# EAGLE board CFT-PB2 (EAGLE 5.11)
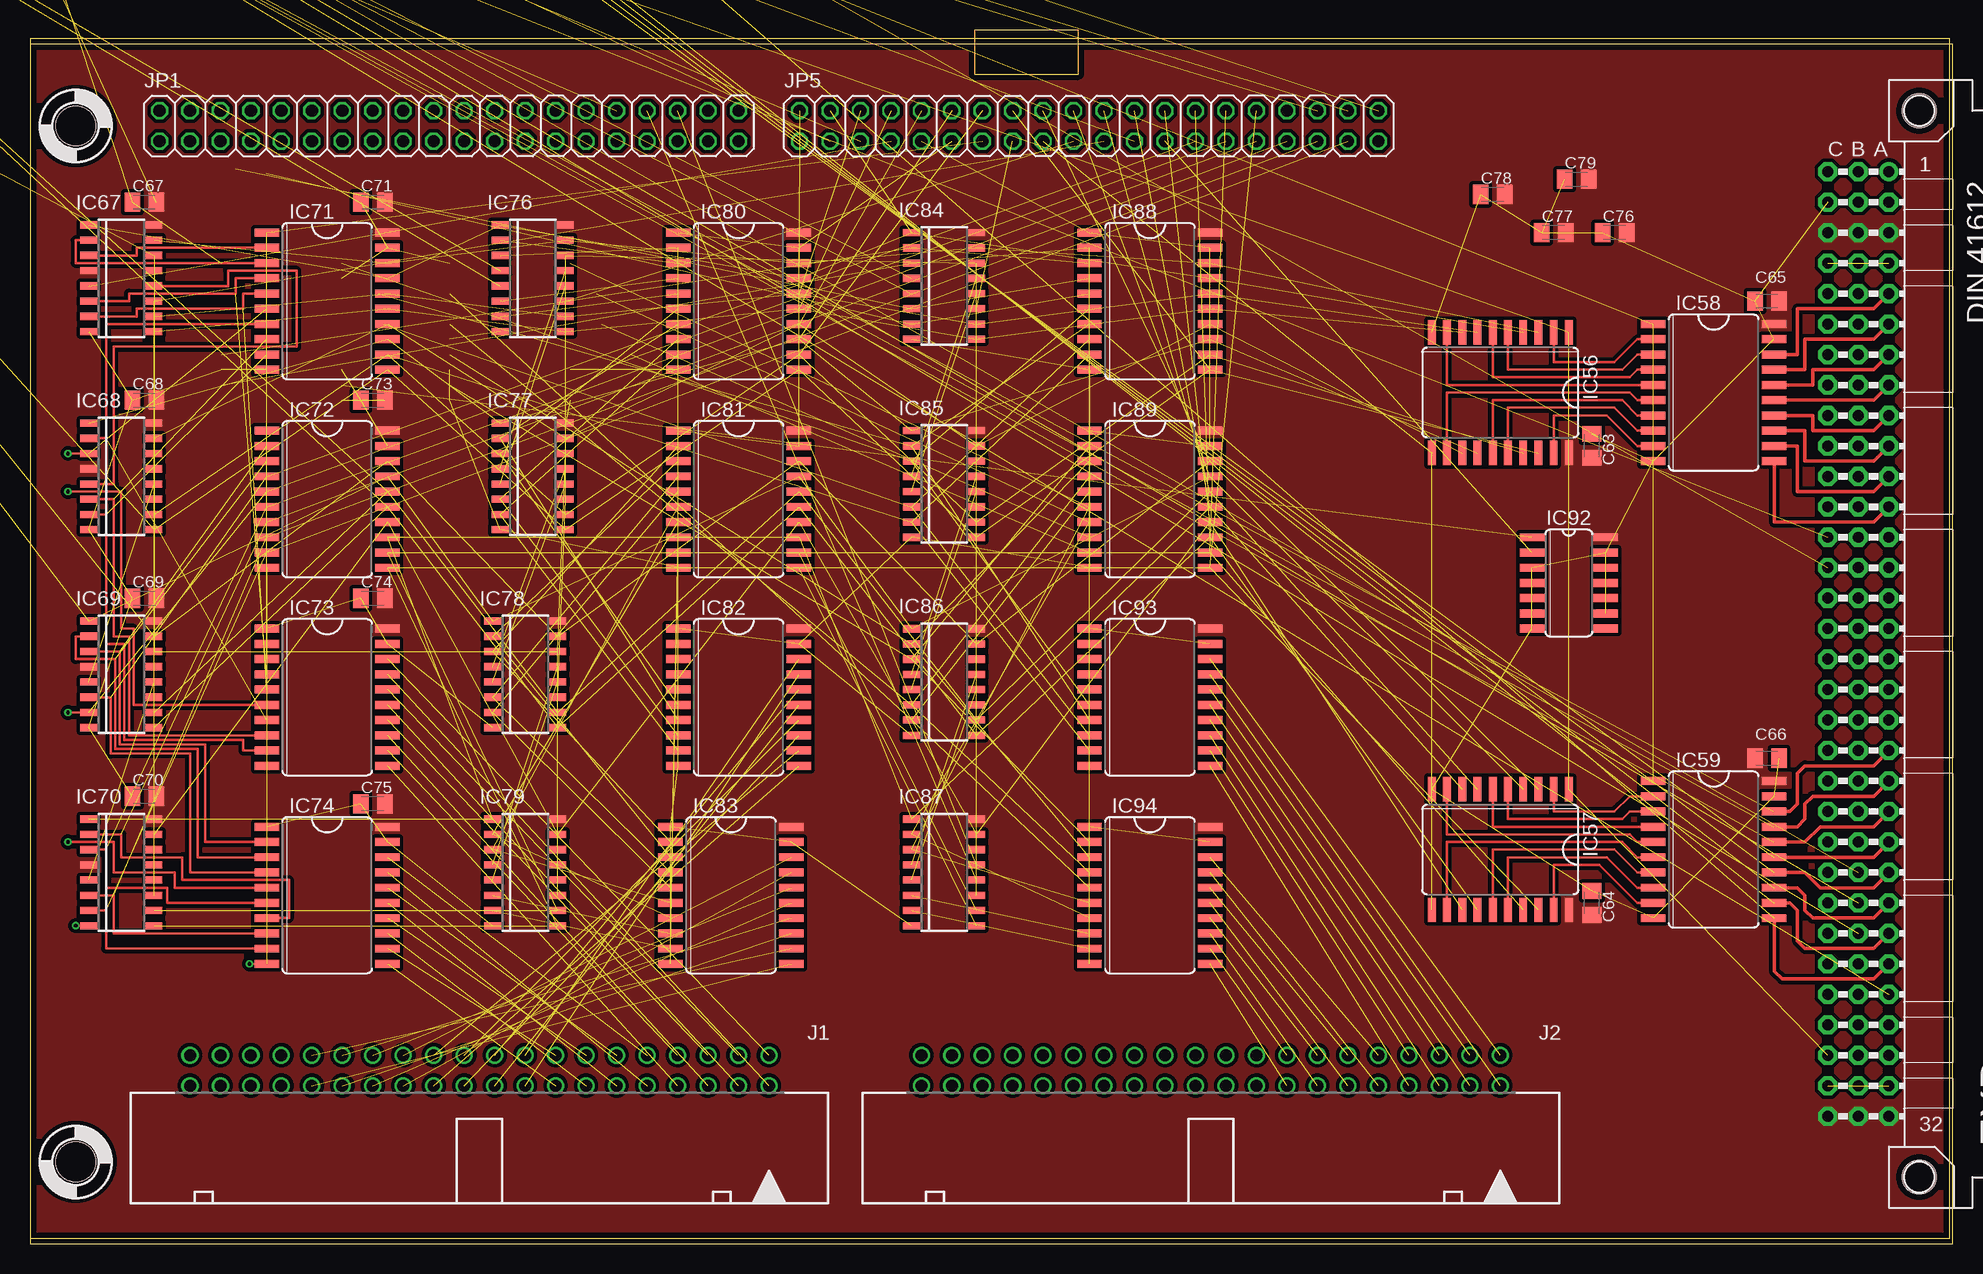
[diagram p0: board, top side]
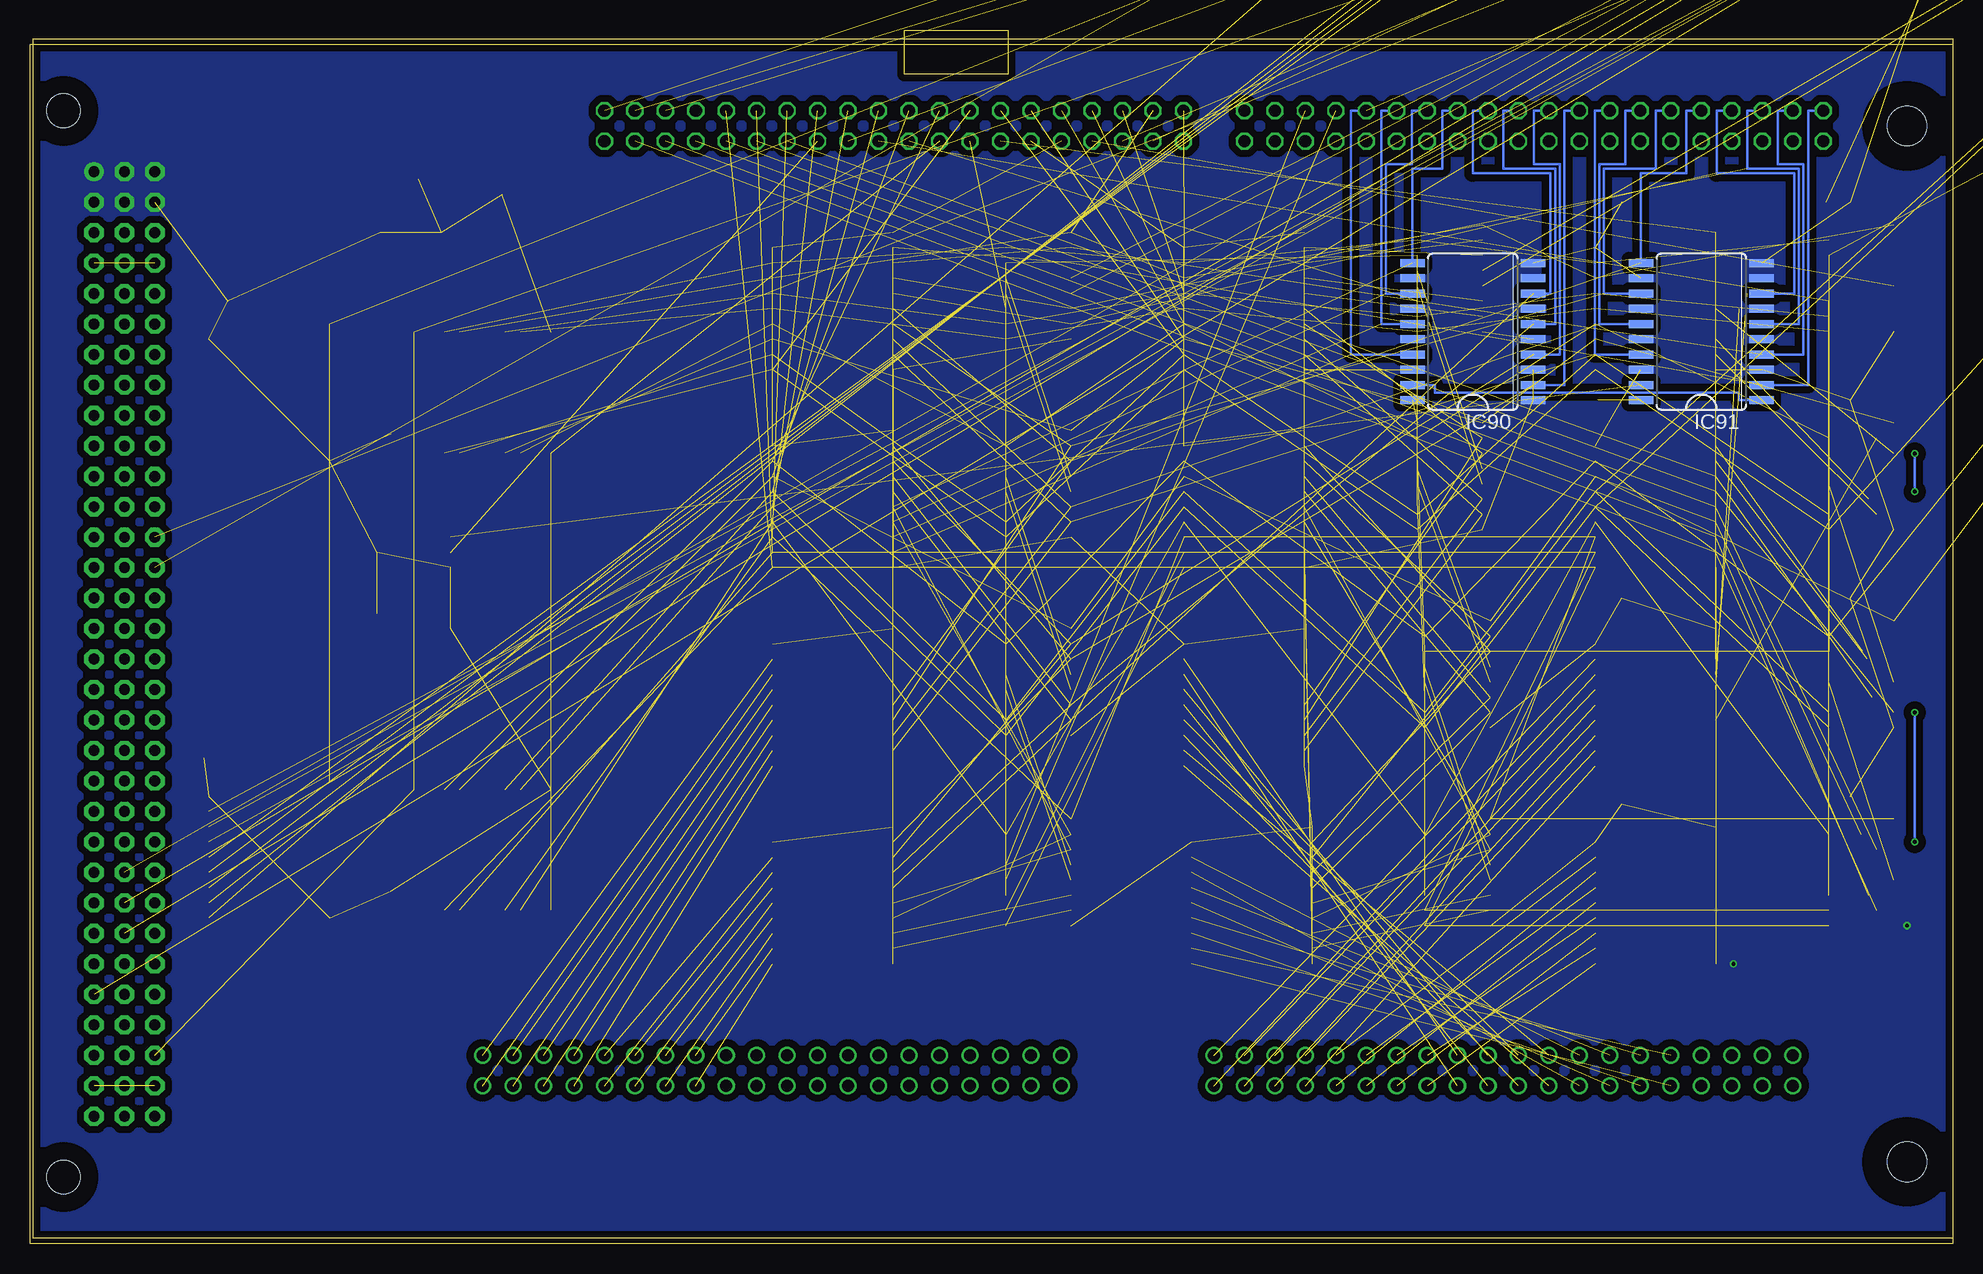
[diagram p1: board, bottom side, seen from below]

Size 160 x 100.71 mm. Coordinates in mm from the lower left corner, seen from the top.
Outline: 0,0 160,0 160,100 0,100 0,0
Copper layers (1*16): Top 0.035mm / dielectric 0.2mm / Bottom 0.035mm
Design rules "Myro-4mil-4layer *": minimum track width 4mil, minimum drill 6mil, track to track 4mil, track to pad 4mil, pad to pad 4mil, via to via 4mil, smd to smd 4mil, copper to edge 20mil, drill to drill 8mil, minimum pad ring 8mil, minimum via ring 6mil, stop-mask expansion 3mil, vias tented up to drill 0mil, thermal gap 8mil
Net classes: 0 default: width 0.305 mm, clearance 0.203 mm; 1 low power: width 1.27 mm, clearance 0.254 mm; 2 LED power: width 1.93 mm, clearance 0.254 mm

## Footprints (pad centres in the part's own frame; a part is rotated, then mirrored left to right if it is on the bottom)
C0805K = smd 1.3 x 1.6: 1 -1,0; 2 1,0
C025-024X044 = drill 0.813 octagon: 1 -1.27,0; 2 1.27,0
E2,5-5 = drill 0.813 pad 1.6 round: + -1.27,0 | drill 0.813 pad 1.6 octagon: - 1.27,0
VG96K = drill 0.914 pad 1.6 round: A1 154.94,39.37 | drill 0.914 pad 1.6 octagon: A2 154.94,36.83; A3 154.94,34.29; A4 154.94,31.75; A5 154.94,29.21; A6 154.94,26.67; A7 154.94,24.13; A8 154.94,21.59; A9 154.94,19.05; A10 154.94,16.51; A11 154.94,13.97; A12 154.94,11.43; A13 154.94,8.89; A14 154.94,6.35; A15 154.94,3.81; A16 154.94,1.27; A17 154.94,-1.27; A18 154.94,-3.81; A19 154.94,-6.35; A20 154.94,-8.89; A21 154.94,-11.43; A22 154.94,-13.97; A23 154.94,-16.51; A24 154.94,-19.05; A25 154.94,-21.59; A26 154.94,-24.13; A27 154.94,-26.67; A28 154.94,-29.21; A29 154.94,-31.75; A30 154.94,-34.29; A31 154.94,-36.83; A32 154.94,-39.37; B1 152.4,39.37; B2 152.4,36.83; B3 152.4,34.29; B4 152.4,31.75; B5 152.4,29.21; B6 152.4,26.67; B7 152.4,24.13; B8 152.4,21.59; B9 152.4,19.05; B10 152.4,16.51; B11 152.4,13.97; B12 152.4,11.43; B13 152.4,8.89; B14 152.4,6.35; B15 152.4,3.81; B16 152.4,1.27; B17 152.4,-1.27; B18 152.4,-3.81; B19 152.4,-6.35; B20 152.4,-8.89; B21 152.4,-11.43; B22 152.4,-13.97; B23 152.4,-16.51; B24 152.4,-19.05; B25 152.4,-21.59; B26 152.4,-24.13; B27 152.4,-26.67; B28 152.4,-29.21; B29 152.4,-31.75; B30 152.4,-34.29; B31 152.4,-36.83; B32 152.4,-39.37; C1 149.86,39.37; C2 149.86,36.83; C3 149.86,34.29; C4 149.86,31.75; C5 149.86,29.21; C6 149.86,26.67; C7 149.86,24.13; C8 149.86,21.59; C9 149.86,19.05; C10 149.86,16.51; C11 149.86,13.97; C12 149.86,11.43; C13 149.86,8.89; C14 149.86,6.35; C15 149.86,3.81; C16 149.86,1.27; C17 149.86,-1.27; C18 149.86,-3.81; C19 149.86,-6.35; C20 149.86,-8.89; C21 149.86,-11.43; C22 149.86,-13.97; C23 149.86,-16.51; C24 149.86,-19.05; C25 149.86,-21.59; C26 149.86,-24.13; C27 149.86,-26.67; C28 149.86,-29.21; C29 149.86,-31.75; C30 149.86,-34.29; C31 149.86,-36.83; C32 149.86,-39.37 | hole 2.794: 157.48,44.45; 157.48,-44.45
STANDOFF_28_60 = hole 3.302: 0,0
SO14 = smd 0.66 x 2.032: 1 -3.81,-3.073; 2 -2.54,-3.073; 3 -1.27,-3.073; 4 0,-3.073; 5 1.27,-3.073; 6 2.54,-3.073; 7 3.81,-3.073; 8 3.81,3.073; 9 2.54,3.073; 10 1.27,3.073; 11 0,3.073; 12 -1.27,3.073; 13 -2.54,3.073; 14 -3.81,3.073
SO20W = smd 0.66 x 2.032: 1 -5.715,-5.029; 2 -4.445,-5.029; 3 -3.175,-5.029; 4 -1.905,-5.029; 5 -0.635,-5.029; 6 0.635,-5.029; 7 1.905,-5.029; 8 3.175,-5.029; 9 4.445,-5.029; 10 5.715,-5.029; 11 5.715,5.029; 12 4.445,5.029; 13 3.175,5.029; 14 1.905,5.029; 15 0.635,5.029; 16 -0.635,5.029; 17 -1.905,5.029; 18 -3.175,5.029; 19 -4.445,5.029; 20 -5.715,5.029
SO16 = smd 0.66 x 2.032: 1 -4.445,-3.073; 2 -3.175,-3.073; 3 -1.905,-3.073; 4 -0.635,-3.073; 5 0.635,-3.073; 6 1.905,-3.073; 7 3.175,-3.073; 8 4.445,-3.073; 9 4.445,3.073; 10 3.175,3.073; 11 1.905,3.073; 12 0.635,3.073; 13 -0.635,3.073; 14 -1.905,3.073; 15 -3.175,3.073; 16 -4.445,3.073
SO16D = smd 0.6 x 1.4: 1 -4.445,-2.715; 2 -3.175,-2.715; 3 -1.905,-2.715; 4 -0.635,-2.715; 5 0.635,-2.715; 6 1.905,-2.715; 7 3.175,-2.715; 8 4.445,-2.715; 9 4.445,2.715; 10 3.175,2.715; 11 1.905,2.715; 12 0.635,2.715; 13 -0.635,2.715; 14 -1.905,2.715; 15 -3.175,2.715; 16 -4.445,2.715
PAK100/2500-5-40 = drill 1 pad 1.422 round: 1 -24.13,-1.27; 2 -24.13,1.27; 3 -21.59,-1.27; 4 -21.59,1.27; 5 -19.05,-1.27; 6 -19.05,1.27; 7 -16.51,-1.27; 8 -16.51,1.27; 9 -13.97,-1.27; 10 -13.97,1.27; 11 -11.43,-1.27; 12 -11.43,1.27; 13 -8.89,-1.27; 14 -8.89,1.27; 15 -6.35,-1.27; 16 -6.35,1.27; 17 -3.81,-1.27; 18 -3.81,1.27; 19 -1.27,-1.27; 20 -1.27,1.27; 21 1.27,-1.27; 22 1.27,1.27; 23 3.81,-1.27; 24 3.81,1.27; 25 6.35,-1.27; 26 6.35,1.27; 27 8.89,-1.27; 28 8.89,1.27; 29 11.43,-1.27; 30 11.43,1.27; 31 13.97,-1.27; 32 13.97,1.27; 33 16.51,-1.27; 34 16.51,1.27; 35 19.05,-1.27; 36 19.05,1.27; 37 21.59,-1.27; 38 21.59,1.27; 39 24.13,-1.27; 40 24.13,1.27
2X20 = drill 1.016 octagon: 1 -24.13,-1.27; 2 -24.13,1.27; 3 -21.59,-1.27; 4 -21.59,1.27; 5 -19.05,-1.27; 6 -19.05,1.27; 7 -16.51,-1.27; 8 -16.51,1.27; 9 -13.97,-1.27; 10 -13.97,1.27; 11 -11.43,-1.27; 12 -11.43,1.27; 13 -8.89,-1.27; 14 -8.89,1.27; 15 -6.35,-1.27; 16 -6.35,1.27; 17 -3.81,-1.27; 18 -3.81,1.27; 19 -1.27,-1.27; 20 -1.27,1.27; 21 1.27,-1.27; 22 1.27,1.27; 23 3.81,-1.27; 24 3.81,1.27; 25 6.35,-1.27; 26 6.35,1.27; 27 8.89,-1.27; 28 8.89,1.27; 29 11.43,-1.27; 30 11.43,1.27; 31 13.97,-1.27; 32 13.97,1.27; 33 16.51,-1.27; 34 16.51,1.27; 35 19.05,-1.27; 36 19.05,1.27; 37 21.59,-1.27; 38 21.59,1.27; 39 24.13,-1.27; 40 24.13,1.27
SIGNAL-RENAME = smd 0.305 x 0.152: P$1 0,0; P$2 0,0

## Placement (x,y rotation side)
C63  0.1uF  [C0805K]  130.18,66.04 270 top
C64  0.1uF  [C0805K]  130.18,27.94 270 top
C65  0.1uF  [C0805K]  144.78,78.11 0 top
C66  0.1uF  [C0805K]  144.78,40.01 180 top
C67  0.1uF  [C0805K]  9.53,86.36 0 top
C68  0.1uF  [C0805K]  9.53,69.85 0 top
C69  0.1uF  [C0805K]  9.53,53.34 0 top
C70  0.1uF  [C0805K]  9.53,36.83 0 top
C71  0.1uF  [C0805K]  28.57,86.36 0 top
C72  1uF  [C025-024X044]  -59.69,200.66 0 top  (outside the outline)
C73  0.1uF  [C0805K]  28.57,69.85 0 top
C74  0.1uF  [C0805K]  28.57,53.34 0 top
C75  0.1uF  [C0805K]  28.57,36.2 0 top
C76  0.1uF  [C0805K]  132.08,83.82 0 top
C77  0.1uF  [C0805K]  127,83.82 0 top
C78  0.1uF  [C0805K]  121.92,87 0 top
C79  0.1uF  [C0805K]  128.91,88.27 0 top
C80  0.1uF  [C025-024X044]  -121.92,193.04 0 top  (outside the outline)
C81  1uF  [C025-024X044]  -64.77,200.66 0 top  (outside the outline)
C82  0.1uF  [C025-024X044]  -128.27,193.04 0 top  (outside the outline)
C83  0.1uF  [C025-024X044]  -134.62,193.04 0 top  (outside the outline)
C84  0.1uF  [C025-024X044]  -140.97,193.04 0 top  (outside the outline)
C85  0.1uF  [C025-024X044]  -147.32,193.04 0 top  (outside the outline)
C86  0.1uF  [C025-024X044]  -153.67,193.04 0 top  (outside the outline)
C87  0.1uF  [C025-024X044]  -160.02,193.04 0 top  (outside the outline)
C88  0.1uF  [C025-024X044]  -166.37,193.04 0 top  (outside the outline)
C89  0.1uF  [C025-024X044]  -172.72,193.04 0 top  (outside the outline)
C90  1uF  [C025-024X044]  -69.85,200.66 0 top  (outside the outline)
C91  0.1uF  [C025-024X044]  -179.07,193.04 0 top  (outside the outline)
C92  0.1uF  [C025-024X044]  -185.42,193.04 0 top  (outside the outline)
C93  0.1uF  [C025-024X044]  -191.77,193.04 0 top  (outside the outline)
C94  0.1uF  [C025-024X044]  -198.12,193.04 0 top  (outside the outline)
C95  0.1uF  [C025-024X044]  -16.51,200.66 0 top  (outside the outline)
C96  0.1uF  [C025-024X044]  -22.86,200.66 0 top  (outside the outline)
C97  0.1uF  [C025-024X044]  -29.21,200.66 0 top  (outside the outline)
C98  0.1uF  [C025-024X044]  -35.56,200.66 0 top  (outside the outline)
C99  0.1uF  [C025-024X044]  -41.91,200.66 0 top  (outside the outline)
C100  0.1uF  [C025-024X044]  -48.26,200.66 0 top  (outside the outline)
C101  1uF  [C025-024X044]  -54.61,200.66 0 top  (outside the outline)
C372  1uF  [E2,5-5]  -106.68,200.66 0 top  (outside the outline)
EXP  [VG96K]  0,49.53 0 top
H1  HOLE  [STANDOFF_28_60]  -76.2,200.66 0 top  (outside the outline)
H2  HOLE  [STANDOFF_28_60]  -82.55,200.66 0 top  (outside the outline)
H3  HOLE  [STANDOFF_28_60]  3.81,6.35 0 top
H4  HOLE  [STANDOFF_28_60]  3.81,92.71 0 top
IC55  74HC08D  [SO14]  -125.73,172.72 0 top  (outside the outline)
IC56  74HC273DW  [SO20W]  122.56,70.48 180 top
IC57  74HC273DW  [SO20W]  122.56,32.38 180 top
IC58  74HC541DW  [SO20W]  140.34,70.48 270 top
IC59  74HC541DW  [SO20W]  140.34,32.38 270 top
IC60  74HC138D  [SO16]  -85.09,172.72 0 top  (outside the outline)
IC63  74HC74D  [SO14]  -138.43,172.72 0 top  (outside the outline)
IC64  74HC688DW  [SO20W]  -20.32,161.29 0 top  (outside the outline)
IC65  74HC138D  [SO16]  -99.06,172.72 0 top  (outside the outline)
IC66  74HC04D  [SO14]  -151.13,172.72 0 top  (outside the outline)
IC67  74HC193D  [SO16D]  7.62,80.01 270 top
IC68  74HC193D  [SO16D]  7.62,63.5 270 top
IC69  74HC193D  [SO16D]  7.62,46.99 270 top
IC70  74HC193D  [SO16D]  7.62,30.48 270 top
IC71  74HC541DW  [SO20W]  24.77,78.11 270 top
IC72  74HC541DW  [SO20W]  24.77,61.59 270 top
IC73  74HC541DW  [SO20W]  24.77,45.09 270 top
IC74  74HC541DW  [SO20W]  24.77,28.57 270 top
IC75  74HC139D  [SO16]  -113.03,172.72 0 top  (outside the outline)
IC76  74HC193D  [SO16D]  41.91,80.01 270 top
IC77  74HC193D  [SO16D]  41.91,63.5 270 top
IC78  74HC193D  [SO16D]  41.27,46.99 270 top
IC79  74HC193D  [SO16D]  41.27,30.48 270 top
IC80  74HC541DW  [SO20W]  59.05,78.11 270 top
IC81  74HC541DW  [SO20W]  59.05,61.59 270 top
IC82  74HC541DW  [SO20W]  59.05,45.09 270 top
IC83  74HC541DW  [SO20W]  58.42,28.57 270 top
IC84  74HC193D  [SO16D]  76.2,79.38 270 top
IC85  74HC193D  [SO16D]  76.2,62.87 270 top
IC86  74HC193D  [SO16D]  76.2,46.35 270 top
IC87  74HC193D  [SO16D]  76.2,30.48 270 top
IC88  74HC541DW  [SO20W]  93.34,78.11 270 top
IC89  74HC541DW  [SO20W]  93.34,61.59 270 top
IC90  74HC688DW  [SO20W]  40.01,75.56 90 bottom
IC91  74HC688DW  [SO20W]  20.95,75.56 90 bottom
IC92  74HC04D  [SO14]  128.27,54.61 270 top
IC93  74HC541DW  [SO20W]  93.34,45.09 270 top
IC94  74HC541DW  [SO20W]  93.34,28.57 270 top
J1  2540-5  [PAK100/2500-5-40]  37.47,13.97 180 top
J2  2540-5  [PAK100/2500-5-40]  98.42,13.97 180 top
JP1  [2X20]  34.92,92.71 0 top
JP5  [2X20]  88.27,92.71 0 top
X1  SIGNAL-RENAME  [SIGNAL-RENAME]  -193.04,198.12 0 top  (outside the outline)

## Library data of the parts
C63-C101 C372 = rcl
EXP = alexios-19inch
H1-H4 IC56-IC60 IC63-IC94 X1 = alexios
IC55 = 74xx-eu
J1 J2 = con-3m; OC_FARNELL: 9838414; OC_NEWARK: unknown
JP1 JP5 = pinhead

## Nets
!ABEN: IC55.3 IC58.1 IC59.1 IC65.5
!ACB1: IC84.13 IC85.4
!ACB2: IC85.13 IC86.4
!ACB3: IC86.13 IC87.4
!ACC1: IC84.12 IC85.5
!ACC2: IC85.12 IC86.5
!ACC3: IC86.12 IC87.5
!ACDOWN: IC75.12 IC84.4
!ACUP: IC75.11 IC84.5
!AINDEX: IC63.5 JP5.38
!CLL: JP1.1
!CPL: JP1.3
!DEC: IC75.3 IC75.13 JP5.40
!DECCPL: IC87.13 JP1.36
!DRB1: IC76.13 IC77.4
!DRB2: IC77.13 IC78.4
!DRB3: IC78.13 IC79.4
!DRC1: IC76.12 IC77.5
!DRC2: IC77.12 IC78.5
!DRC3: IC78.12 IC79.5
!DRDOWN: IC75.4 IC76.4
!DRUP: IC75.5 IC76.5
!ENDEXT: EXP.B7
!FZERO: IC91.19 IC92.1
!HALT: EXP.A19
!INCCPL: IC87.12 JP1.34
!INCPC: IC67.5 JP5.7
!IO: EXP.C14 IC55.2 IC64.1
!IODEV1XX: EXP.B24 IC65.14
!IODEV2XX: EXP.B25 IC65.13
!IODEV3XX: EXP.B26 IC65.12
!IRQ: EXP.C29
!IRQ0: EXP.C18
!IRQ1: EXP.C19
!IRQ2: EXP.C20
!IRQ3: EXP.A13
!IRQ4: EXP.A14
!IRQ5: EXP.A15
!IRQ6: EXP.A16
!IRQ7: EXP.A18
!IRQS: EXP.A30
!IS_AUTOINDEX: IC60.7 IC63.2
!MEM: EXP.C13 IC55.1
!R: EXP.C15
!RAC: IC88.1 IC88.19 IC89.1 IC89.19 JP5.9
!RDR: IC80.1 IC80.19 IC81.1 IC81.19 JP5.11
!RESET: EXP.C30 IC56.1 IC57.1 IC63.4 IC66.1
!RPC: IC71.1 IC72.1 JP5.13
!RSTHOLD: JP1.5
!SKIPEXT: EXP.B6
!STPAC: IC75.14 JP5.3
!STPDR: IC75.2 JP5.5
!SYSDEV: EXP.A28 IC65.15
!T34: EXP.B27
!W: EXP.C16
!WAC: IC84.11 IC85.11 IC86.11 IC87.11 JP5.15
!WALU: JP1.7
!WAR: IC56.11 IC57.11 JP5.17
!WDR: IC76.11 IC77.11 IC78.11 IC79.11 JP5.19
!WIR: IC63.3 JP5.36
!WPC: IC67.11 IC68.11 IC69.11 IC70.11 JP5.21
!WS: EXP.B8
*TPA: EXP.A17
*TPC: EXP.C17
+3.3V: EXP.A4 EXP.B4 EXP.C4
+12V [LED power]: EXP.A31 EXP.B31 EXP.C31
AB0: EXP.A5 IC58.18
AB1: EXP.A6 IC58.17
AB2: EXP.A7 IC58.16
AB3: EXP.A8 IC58.15
AB4: EXP.A9 IC58.14
AB5: EXP.A10 IC58.13
AB6: EXP.A11 IC58.12
AB7: EXP.A12 IC58.11
AB8: EXP.A20 IC59.18 IC65.1
AB9: EXP.A21 IC59.17 IC65.2
AB10: EXP.A22 IC59.16 IC65.3
AB11: EXP.A23 IC59.15 IC64.2
AB12: EXP.A24 IC59.14 IC64.4
AB13: EXP.A25 IC59.13 IC64.6
AB14: EXP.A26 IC59.12 IC64.8
AB15: EXP.A27 IC59.11 IC64.11
AC0: IC84.3 IC88.2 IC91.2 IC93.2 JP1.2
AC1: IC84.2 IC88.3 IC91.4 IC93.3 JP1.4
AC2: IC84.6 IC88.4 IC91.6 IC93.4 JP1.6
AC3: IC84.7 IC88.5 IC91.8 IC93.5 JP1.8
AC4: IC85.3 IC88.6 IC91.11 IC93.6 JP1.10
AC5: IC85.2 IC88.7 IC91.13 IC93.7 JP1.12
AC6: IC85.6 IC88.8 IC91.15 IC93.8 JP1.14
AC7: IC85.7 IC88.9 IC91.17 IC93.9 JP1.16
AC8: IC86.3 IC89.2 IC90.2 IC94.2 JP1.18
AC9: IC86.2 IC89.3 IC90.4 IC94.3 JP1.20
AC10: IC86.6 IC89.4 IC90.6 IC94.4 JP1.22
AC11: IC86.7 IC89.5 IC90.8 IC94.5 JP1.24
AC12: IC87.3 IC89.6 IC90.11 IC94.6 JP1.26
AC13: IC87.2 IC89.7 IC90.13 IC94.7 JP1.28
AC14: IC87.6 IC89.8 IC90.15 IC94.8 JP1.30
AC15: IC87.7 IC89.9 IC90.17 IC94.9 JP1.32 X1.P$1
AEXT0: EXP.B13
AEXT1: EXP.B14
AEXT2: EXP.B15
AEXT3: EXP.B16
AEXT4: EXP.B17
AEXT5: EXP.B18
AEXT6: EXP.B19
AEXT7: EXP.B20
AR0: IC56.2 IC58.2
AR1: IC56.5 IC58.3
AR2: IC56.6 IC58.4
AR3: IC56.9 IC58.5
AR4: IC56.12 IC58.6
AR5: IC56.15 IC58.7
AR6: IC56.16 IC58.8
AR7: IC56.19 IC58.9
AR8: IC57.2 IC59.2
AR9: IC57.5 IC59.3
AR10: IC57.6 IC59.4
AR11: IC57.9 IC59.5
AR12: IC57.12 IC59.6
AR13: IC57.15 IC59.7
AR14: IC57.16 IC59.8
AR15: IC57.19 IC59.9
CLK1: EXP.A29
CLK2: EXP.B29
CLK3: EXP.B30
CLK4: EXP.B28
DB0: EXP.C5
DB1: EXP.C6
DB2: EXP.C7
DB3: EXP.C8
DB4: EXP.C9
DB5: EXP.C10
DB6: EXP.C11
DB7: EXP.C12
DB8: EXP.C21
DB9: EXP.C22
DB10: EXP.C23
DB11: EXP.C24
DB12: EXP.C25
DB13: EXP.C26
DB14: EXP.C27
DB15: EXP.C28
DR0: IC76.3 IC80.2 IC82.2
DR1: IC76.2 IC80.3 IC82.3
DR2: IC76.6 IC80.4 IC82.4
DR3: IC76.7 IC80.5 IC82.5
DR4: IC77.3 IC80.6 IC82.6
DR5: IC77.2 IC80.7 IC82.7
DR6: IC77.6 IC80.8 IC82.8
DR7: IC77.7 IC80.9 IC82.9
DR8: IC78.3 IC81.2 IC83.2
DR9: IC78.2 IC81.3 IC83.3
DR10: IC78.6 IC81.4 IC83.4
DR11: IC78.7 IC81.5 IC83.5
DR12: IC79.3 IC81.6 IC83.6
DR13: IC79.2 IC81.7 IC83.7
DR14: IC79.6 IC81.8 IC83.8
DR15: IC79.7 IC81.9 IC83.9
FL: JP1.9
FNEG: JP5.23 X1.P$2
FV: JP1.11
FZERO: IC92.2 JP5.25
GND [low power]: C63.1 C64.1 C65.1 C66.1 C67.1 C68.1 C69.1 C70.1 C71.1 C72.2 C73.1 C74.1 C75.1 C76.1 C77.1 C78.1 C79.1 C80.1 C81.2 C82.1 C83.1 C84.1 C85.1 C86.1 C87.1 C88.1 C89.1 C90.2 C91.1 C92.1 C93.1 C94.1 C95.1 C96.1 C97.1 C98.1 C99.1 C100.1 C101.2 C372.- EXP.A1 EXP.A2 EXP.B1 EXP.B2 EXP.C1 EXP.C2 IC55.4 IC55.5 IC55.7 IC55.9 IC55.10 IC55.12 IC55.13 IC56.10 IC57.10 IC58.10 IC58.19 IC59.10 IC59.19 IC60.8 IC63.7 IC63.10 IC63.11 IC63.12 IC63.13 IC64.3 IC64.5 IC64.7 IC64.9 IC64.10 IC64.12 IC64.13 IC64.14 IC64.15 IC64.16 IC64.17 IC64.18 IC65.8 IC66.3 IC66.5 IC66.7 IC66.9 IC66.11 IC66.13 IC67.8 IC68.8 IC69.8 IC70.8 IC71.10 IC71.19 IC72.10 IC72.19 IC73.1 IC73.10 IC73.19 IC74.1 IC74.10 IC74.19 IC75.1 IC75.8 IC75.15 IC76.8 IC77.8 IC78.8 IC79.8 IC80.10 IC81.10 IC82.1 IC82.10 IC82.19 IC83.1 IC83.10 IC83.19 IC84.8 IC85.8 IC86.8 IC87.8 IC88.10 IC89.10 IC90.1 IC90.3 IC90.5 IC90.7 IC90.9 IC90.10 IC90.12 IC90.14 IC90.16 IC90.18 IC91.3 IC91.5 IC91.7 IC91.9 IC91.10 IC91.12 IC91.14 IC91.16 IC91.18 IC92.3 IC92.5 IC92.7 IC92.9 IC92.11 IC92.13 IC93.1 IC93.10 IC93.19 IC94.1 IC94.10 IC94.19
IBUS0: IC56.3 IC67.15 IC71.18 IC76.15 IC80.18 IC84.15 IC88.18 JP5.2
IBUS1: IC56.4 IC67.1 IC71.17 IC76.1 IC80.17 IC84.1 IC88.17 JP5.4
IBUS2: IC56.7 IC67.10 IC71.16 IC76.10 IC80.16 IC84.10 IC88.16 JP5.6
IBUS3: IC56.8 IC67.9 IC71.15 IC76.9 IC80.15 IC84.9 IC88.15 JP5.8
IBUS4: IC56.13 IC68.15 IC71.14 IC77.15 IC80.14 IC85.15 IC88.14 JP5.10
IBUS5: IC56.14 IC68.1 IC71.13 IC77.1 IC80.13 IC85.1 IC88.13 JP5.12
IBUS6: IC56.17 IC68.10 IC71.12 IC77.10 IC80.12 IC85.10 IC88.12 JP5.14
IBUS7: IC56.18 IC60.1 IC68.9 IC71.11 IC77.9 IC80.11 IC85.9 IC88.11 JP5.16
IBUS8: IC57.3 IC60.4 IC69.15 IC72.18 IC78.15 IC81.18 IC86.15 IC89.18 JP5.18
IBUS9: IC57.4 IC60.5 IC69.1 IC72.17 IC78.1 IC81.17 IC86.1 IC89.17 JP5.20
IBUS10: IC57.7 IC60.2 IC69.10 IC72.16 IC78.10 IC81.16 IC86.10 IC89.16 JP5.22
IBUS11: IC57.8 IC60.3 IC69.9 IC72.15 IC78.9 IC81.15 IC86.9 IC89.15 JP5.24
IBUS12: IC57.13 IC70.15 IC72.14 IC79.15 IC81.14 IC87.15 IC89.14 JP5.26
IBUS13: IC57.14 IC70.1 IC72.13 IC79.1 IC81.13 IC87.1 IC89.13 JP5.28
IBUS14: IC57.17 IC70.10 IC72.12 IC79.10 IC81.12 IC87.10 IC89.12 JP5.30
IBUS15: IC57.18 IC70.9 IC72.11 IC79.9 IC81.11 IC87.9 IC89.11 JP5.32
IR0: JP1.13
IR1: JP1.15
IR2: JP1.17
IR3: JP1.19
N$70: IC67.12 IC68.5
N$71: IC68.12 IC69.5
N$95: IC64.19 IC65.4
N$734: IC69.12 IC70.5
N$736: IC73.18 J1.1
N$737: IC73.17 J1.2
N$738: IC73.16 J1.3
N$740: IC73.15 J1.4
N$741: IC73.14 J1.5
N$742: IC73.13 J1.6
N$743: IC73.12 J1.7
N$744: IC73.11 J1.8
N$745: IC74.18 J1.9
N$746: IC74.17 J1.10
N$747: IC74.16 J1.11
N$748: IC74.15 J1.12
N$749: IC74.14 J1.13
N$750: IC74.13 J1.14
N$751: IC74.12 J1.15
N$752: IC74.11 J1.16
N$753: IC82.18 J1.17
N$754: IC82.17 J1.18
N$755: IC82.16 J1.19
N$756: IC82.15 J1.20
N$757: IC82.14 J1.21
N$758: IC82.13 J1.22
N$759: IC82.12 J1.23
N$760: IC82.11 J1.24
N$761: IC83.18 J1.25
N$762: IC83.17 J1.26
N$763: IC83.16 J1.27
N$764: IC83.15 J1.28
N$765: IC83.14 J1.29
N$766: IC83.13 J1.30
N$767: IC83.12 J1.31
N$768: IC83.11 J1.32
N$773: IC93.18 J2.1
N$775: IC93.17 J2.2
N$776: IC93.16 J2.3
N$777: IC93.15 J2.4
N$778: IC93.14 J2.5
N$779: IC93.13 J2.6
N$780: IC93.12 J2.7
N$781: IC93.11 J2.8
N$782: IC94.18 J2.9
N$783: IC94.17 J2.10
N$784: IC94.16 J2.11
N$785: IC94.15 J2.12
N$786: IC94.14 J2.13
N$787: IC94.13 J2.14
N$788: IC94.12 J2.15
N$789: IC94.11 J2.16
N$793: IC90.19 IC91.1
PC0: IC67.3 IC71.2 IC73.2
PC1: IC67.2 IC71.3 IC73.3
PC2: IC67.6 IC71.4 IC73.4
PC3: IC67.7 IC71.5 IC73.5
PC4: IC68.3 IC71.6 IC73.6
PC5: IC68.2 IC71.7 IC73.7
PC6: IC68.6 IC71.8 IC73.8
PC7: IC68.7 IC71.9 IC73.9
PC8: IC69.3 IC72.2 IC74.2
PC9: IC69.2 IC72.3 IC74.3
PC10: IC69.6 IC72.4 IC74.4 JP5.27
PC11: IC69.7 IC72.5 IC74.5 JP5.29
PC12: IC70.3 IC72.6 IC74.6 JP5.31
PC13: IC70.2 IC72.7 IC74.7 JP5.33
PC14: IC70.6 IC72.8 IC74.8 JP5.35
PC15: IC70.7 IC72.9 IC74.9 JP5.37
RESET: IC66.2 IC67.14 IC68.14 IC69.14 IC70.14 IC76.14 IC77.14 IC78.14 IC79.14 IC84.14 IC85.14 IC86.14 IC87.14
RUNIT0: JP1.21
RUNIT1: JP1.23
RUNIT2: JP1.25
RUNIT3: JP1.27
VCC [low power]: C63.2 C64.2 C65.2 C66.2 C67.2 C68.2 C69.2 C70.2 C71.2 C72.1 C73.2 C74.2 C75.2 C76.2 C77.2 C78.2 C79.2 C80.2 C81.1 C82.2 C83.2 C84.2 C85.2 C86.2 C87.2 C88.2 C89.2 C90.1 C91.2 C92.2 C93.2 C94.2 C95.2 C96.2 C97.2 C98.2 C99.2 C100.2 C101.1 C372.+ EXP.A3 EXP.A32 EXP.B3 EXP.B32 EXP.C3 EXP.C32 IC55.14 IC56.20 IC57.20 IC58.20 IC59.20 IC60.6 IC60.16 IC63.1 IC63.14 IC64.20 IC65.6 IC65.16 IC66.14 IC67.4 IC67.16 IC68.4 IC68.16 IC69.4 IC69.16 IC70.4 IC70.16 IC71.20 IC72.20 IC73.20 IC74.20 IC75.16 IC76.16 IC77.16 IC78.16 IC79.16 IC80.20 IC81.20 IC82.20 IC83.20 IC84.16 IC85.16 IC86.16 IC87.16 IC88.20 IC89.20 IC90.20 IC91.20 IC92.14 IC93.20 IC94.20

## Tracks (layer width: path | path; a pad name or v marks a point on that pad's centre or on a via)
!ABEN  (3 unrouted)
!ACB1  (1 unrouted)
!ACB2  (1 unrouted)
!ACB3  (1 unrouted)
!ACC1  (1 unrouted)
!ACC2  (1 unrouted)
!ACC3  (1 unrouted)
!ACDOWN  (1 unrouted)
!ACUP  (1 unrouted)
!AINDEX  (1 unrouted)
!DEC  (2 unrouted)
!DECCPL  (1 unrouted)
!DRB1  (1 unrouted)
!DRB2  (1 unrouted)
!DRB3  (1 unrouted)
!DRC1  (1 unrouted)
!DRC2  (1 unrouted)
!DRC3  (1 unrouted)
!DRDOWN  (1 unrouted)
!DRUP  (1 unrouted)
!FZERO  (1 unrouted)
!INCCPL  (1 unrouted)
!INCPC  (1 unrouted)
!IO  (2 unrouted)
!IODEV1XX  (1 unrouted)
!IODEV2XX  (1 unrouted)
!IODEV3XX  (1 unrouted)
!IS_AUTOINDEX  (1 unrouted)
!MEM  (1 unrouted)
!RAC  (4 unrouted)
!RDR  (4 unrouted)
!RESET  (4 unrouted)
!RPC  (2 unrouted)
!STPAC  (1 unrouted)
!STPDR  (1 unrouted)
!SYSDEV  (1 unrouted)
!WAC  (4 unrouted)
!WAR  (2 unrouted)
!WDR  (4 unrouted)
!WIR  (1 unrouted)
!WPC  (4 unrouted)
+3.3V  (2 unrouted)
+12V  (2 unrouted)
AB0
  Top 0.305: IC58.18 147.32,73.66 147.32,77.47 153.67,77.47 EXP.A5
AB1
  Top 0.305: IC58.17 147.96,72.39 147.96,74.93 153.67,74.93 EXP.A6
AB2
  Top 0.305: IC58.16 148.59,71.12 148.59,72.39 153.67,72.39 EXP.A7
AB3
  Top 0.305: IC58.15 153.67,69.85 EXP.A8
AB4
  Top 0.305: IC58.14 148.59,68.58 148.59,67.31 153.67,67.31 EXP.A9
AB5
  Top 0.305: IC58.13 147.96,67.31 147.96,64.77 153.67,64.77 EXP.A10
AB6
  Top 0.305: IC58.12 147.32,66.04 147.32,62.23 153.67,62.23 EXP.A11
AB7
  Top 0.305: IC58.11 145.41,64.77 145.41,59.69 153.67,59.69 EXP.A12
AB8  (1 unrouted)
  Top 0.305: IC59.18 146.69,35.56 147.32,36.2 147.32,38.73 147.96,39.37 153.67,39.37 EXP.A20
AB9  (1 unrouted)
  Top 0.305: IC59.17 147.32,34.29 147.96,34.92 147.96,36.2 148.59,36.83 153.67,36.83 EXP.A21
AB10  (1 unrouted)
  Top 0.305: IC59.16 147.96,33.02 149.22,34.29 153.67,34.29 EXP.A22
AB11  (1 unrouted)
  Top 0.305: IC59.15 153.67,31.75 EXP.A23
AB12  (1 unrouted)
  Top 0.305: IC59.14 147.96,30.48 149.22,29.21 153.67,29.21 EXP.A24
AB13  (1 unrouted)
  Top 0.305: IC59.13 147.32,29.21 147.96,28.57 147.96,27.3 148.59,26.67 153.67,26.67 EXP.A25
AB14  (1 unrouted)
  Top 0.305: IC59.12 146.69,27.94 147.32,27.3 147.32,24.77 147.96,24.13 153.67,24.13 EXP.A26
AB15  (1 unrouted)
  Top 0.305: IC59.11 145.41,26.67 145.41,22.23 146.05,21.59 153.67,21.59 EXP.A27
AC0  (3 unrouted)
  Bottom 0.203: JP1.2 12.06,93.98 12.06,71.12 IC91.2
AC1  (3 unrouted)
  Bottom 0.203: JP1.4 14.61,93.98 14.61,89.53 12.45,89.53 12.45,73.66 IC91.4
AC2  (3 unrouted)
  Bottom 0.203: JP1.6 17.14,93.98 17.14,89.15 12.83,89.15 12.83,76.2 IC91.6
AC3  (3 unrouted)
  Bottom 0.203: JP1.8 19.68,93.98 19.68,88.77 13.21,88.77 13.21,78.74 IC91.8
AC4  (3 unrouted)
  Bottom 0.203: JP1.10 22.23,93.98 22.23,88.77 25.98,88.77 IC91.11
AC5  (3 unrouted)
  Bottom 0.203: JP1.12 24.77,93.98 24.77,89.15 29.08,89.15 29.08,78.74 IC91.13
AC6  (3 unrouted)
  Bottom 0.203: JP1.14 27.3,93.98 27.3,89.53 29.46,89.53 29.46,76.2 IC91.15
AC7  (3 unrouted)
  Bottom 0.203: JP1.16 29.84,93.98 29.84,73.66 IC91.17
AC8  (3 unrouted)
  Bottom 0.203: JP1.18 32.38,93.98 32.38,71.12 IC90.2
AC9  (3 unrouted)
  Bottom 0.203: JP1.20 34.92,93.98 34.92,89.53 32.77,89.53 32.77,73.66 IC90.4
AC10  (3 unrouted)
  Bottom 0.203: JP1.22 37.47,93.98 37.47,89.15 33.15,89.15 33.15,76.2 IC90.6
AC11  (3 unrouted)
  Bottom 0.203: JP1.24 40.01,93.98 40.01,88.77 33.53,88.77 33.53,78.74 IC90.8
AC12  (3 unrouted)
  Bottom 0.203: JP1.26 42.55,93.98 42.55,89.15 45.03,89.15 IC90.11
AC13  (3 unrouted)
  Bottom 0.203: JP1.28 45.09,93.98 45.09,89.53 47.24,89.53 47.24,78.74 IC90.13
AC14  (3 unrouted)
  Bottom 0.203: JP1.30 47.62,93.98 47.62,76.2 IC90.15
AC15  (4 unrouted)
  Bottom 0.203: JP1.32 50.16,93.98 50.16,73.66 IC90.17
AR0
  Top 0.203: IC58.2 133.99,74.93 132.08,73.03 127,73.03 IC56.2
AR1
  Top 0.203: IC58.3 133.99,73.66 132.72,72.39 123.19,72.39 IC56.5
AR2
  Top 0.203: IC58.4 133.99,72.39 133.35,71.75 121.92,71.75 IC56.6
AR3
  Top 0.203: IC58.5 118.11,71.12 IC56.9
AR4
  Top 0.203: IC58.6 133.99,69.85 133.35,70.48 118.11,70.48 IC56.12
AR5
  Top 0.203: IC58.7 133.99,68.58 132.72,69.85 121.92,69.85 IC56.15
AR6
  Top 0.203: IC58.8 133.99,67.31 132.08,69.22 123.19,69.22 IC56.16
AR7
  Top 0.203: IC58.9 133.99,66.04 131.44,68.58 127,68.58 IC56.19
AR8
  Top 0.203: IC59.2 133.35,36.83 132.08,35.56 127,35.56 IC57.2
AR9
  Top 0.203: IC59.3 133.35,35.56 132.72,34.92 123.19,34.92 IC57.5
AR10
  Top 0.203: IC59.4 121.92,34.29 IC57.6
AR11
  Top 0.203: IC59.5 133.99,33.02 133.35,33.66 118.11,33.66 IC57.9
AR12
  Top 0.203: IC59.6 133.99,31.75 132.72,33.02 118.11,33.02 IC57.12
AR13
  Top 0.203: IC59.7 133.99,30.48 132.08,32.38 121.92,32.38 IC57.15
AR14
  Top 0.203: IC59.8 133.99,29.21 131.44,31.75 123.19,31.75 IC57.16
AR15
  Top 0.203: IC59.9 133.99,27.94 130.81,31.11 127,31.11 IC57.19
DR0  (2 unrouted)
DR1  (2 unrouted)
DR2  (2 unrouted)
DR3  (2 unrouted)
DR4  (2 unrouted)
DR5  (2 unrouted)
DR6  (2 unrouted)
DR7  (2 unrouted)
DR8  (2 unrouted)
DR9  (2 unrouted)
DR10  (2 unrouted)
DR11  (2 unrouted)
DR12  (2 unrouted)
DR13  (2 unrouted)
DR14  (2 unrouted)
DR15  (2 unrouted)
FNEG  (1 unrouted)
FZERO  (1 unrouted)
GND  (via drill 0.3)  (125 unrouted)
  Top 0.203: IC70.8 v3.81,26.04 | IC74.10 v18.29,22.86
  pour Bottom (isolate 0.61, no thermals): 0,100.33 0,0 160.02,0 160.02,100.33
IBUS0  (7 unrouted)
IBUS1  (7 unrouted)
IBUS2  (7 unrouted)
IBUS3  (7 unrouted)
IBUS4  (7 unrouted)
IBUS5  (7 unrouted)
IBUS6  (7 unrouted)
IBUS7  (8 unrouted)
IBUS8  (8 unrouted)
IBUS9  (8 unrouted)
IBUS10  (8 unrouted)
IBUS11  (8 unrouted)
IBUS12  (7 unrouted)
IBUS13  (7 unrouted)
IBUS14  (7 unrouted)
IBUS15  (7 unrouted)
N$70
  Top 0.203: IC68.5 6.99,62.87 6.99,74.3 22.23,74.3 22.23,80.64 16.51,80.64 16.51,79.38 IC67.12
N$71  (1 unrouted)
N$95  (1 unrouted)
N$734  (1 unrouted)
N$736  (1 unrouted)
N$737  (1 unrouted)
N$738  (1 unrouted)
N$740  (1 unrouted)
N$741  (1 unrouted)
N$742  (1 unrouted)
N$743  (1 unrouted)
N$744  (1 unrouted)
N$745  (1 unrouted)
N$746  (1 unrouted)
N$747  (1 unrouted)
N$748  (1 unrouted)
N$749  (1 unrouted)
N$750  (1 unrouted)
N$751  (1 unrouted)
N$752  (1 unrouted)
N$753  (1 unrouted)
N$754  (1 unrouted)
N$755  (1 unrouted)
N$756  (1 unrouted)
N$757  (1 unrouted)
N$758  (1 unrouted)
N$759  (1 unrouted)
N$760  (1 unrouted)
N$761  (1 unrouted)
N$762  (1 unrouted)
N$763  (1 unrouted)
N$764  (1 unrouted)
N$765  (1 unrouted)
N$766  (1 unrouted)
N$767  (1 unrouted)
N$768  (1 unrouted)
N$773  (1 unrouted)
N$775  (1 unrouted)
N$776  (1 unrouted)
N$777  (1 unrouted)
N$778  (1 unrouted)
N$779  (1 unrouted)
N$780  (1 unrouted)
N$781  (1 unrouted)
N$782  (1 unrouted)
N$783  (1 unrouted)
N$784  (1 unrouted)
N$785  (1 unrouted)
N$786  (1 unrouted)
N$787  (1 unrouted)
N$788  (1 unrouted)
N$789  (1 unrouted)
N$793
  Bottom 0.203: IC91.1 17.83,69.85 17.83,70.48 18.41,70.48 43.18,70.48 43.18,71.12 IC90.19
PC0  (1 unrouted)
  Top 0.203: IC67.3 8.89,81.92 8.89,82.55 IC71.2
PC1  (1 unrouted)
  Top 0.203: IC67.2 3.81,83.19 3.81,81.28 IC71.3
PC2  (1 unrouted)
  Top 0.203: IC67.6 8.26,78.11 8.26,78.74 17.14,78.74 17.14,80.01 IC71.4
PC3  (1 unrouted)
  Top 0.203: IC67.7 8.89,76.83 8.89,77.47 17.78,77.47 17.78,78.74 IC71.5
PC4  (via drill 0.3)  (1 unrouted)
  Top 0.203: v3.17,65.41 IC68.3 | v3.17,62.23 7.62,62.23 7.62,50.8 8.64,50.8 8.64,44.45 IC73.6
  Bottom 0.203: v3.17,62.23 v3.17,65.41
PC5  (1 unrouted)
  Top 0.203: IC68.2 6.35,66.67 6.35,76.2 IC71.7
PC6  (1 unrouted)
  Top 0.203: IC68.6 6.99,61.59 6.99,50.16 8.26,50.16 8.26,41.91 IC73.8
PC7  (1 unrouted)
  Top 0.203: IC68.7 6.35,60.33 6.35,49.53 7.87,49.53 7.87,41.53 17.78,41.53 17.78,40.64 IC73.9
PC8  (1 unrouted)
  Top 0.203: IC69.3 7.49,48.9 7.49,41.15 14.61,41.15 14.61,33.02 IC74.2
PC9  (1 unrouted)
  Top 0.203: IC69.2 3.81,50.16 3.81,48.26 7.11,48.26 7.11,40.77 13.97,40.77 13.97,31.75 IC74.3
PC10  (2 unrouted)
  Top 0.203: IC69.6 6.73,45.09 6.73,40.39 13.34,40.39 13.34,30.48 IC74.4
PC11  (via drill 0.3)  (2 unrouted)
  Top 0.203: v3.17,43.81 IC69.7 | IC74.5 12.06,29.21 12.06,30.48 6.99,30.48 6.99,33.02 v3.17,33.02
  Bottom 0.203: v3.17,33.02 v3.17,43.81
PC12  (2 unrouted)
  Top 0.203: IC70.3 6.35,32.38 6.35,29.21 11.43,29.21 11.43,27.94 IC74.6
PC13  (2 unrouted)
  Top 0.203: IC70.2 7.62,33.66 7.62,31.75 12.7,31.75 12.7,29.84 21.59,29.84 21.59,26.67 IC74.7
PC14  (2 unrouted)
  Top 0.203: IC70.6 6.99,28.57 6.99,25.4 IC74.8
PC15  (2 unrouted)
  Top 0.203: IC70.7 6.35,27.3 6.35,24.13 IC74.9
RESET  (12 unrouted)
VCC  (36 unrouted)
  pour Top (isolate 0.305, no thermals): 0,99.69 0,-0.64 160.02,-0.64 160.02,99.69